# Altium PCB Avometer v1.0.PcbDoc
Units mm, origin at the board's own origin, x right, y up, seen from the top; angles counter-clockwise.
Board outline 45 x 22.5 mm, 2 copper layers (Top Layer, Bottom Layer), stack 1.571 mm thick; 39 components, 40 nets, 164 pads, 36 vias.
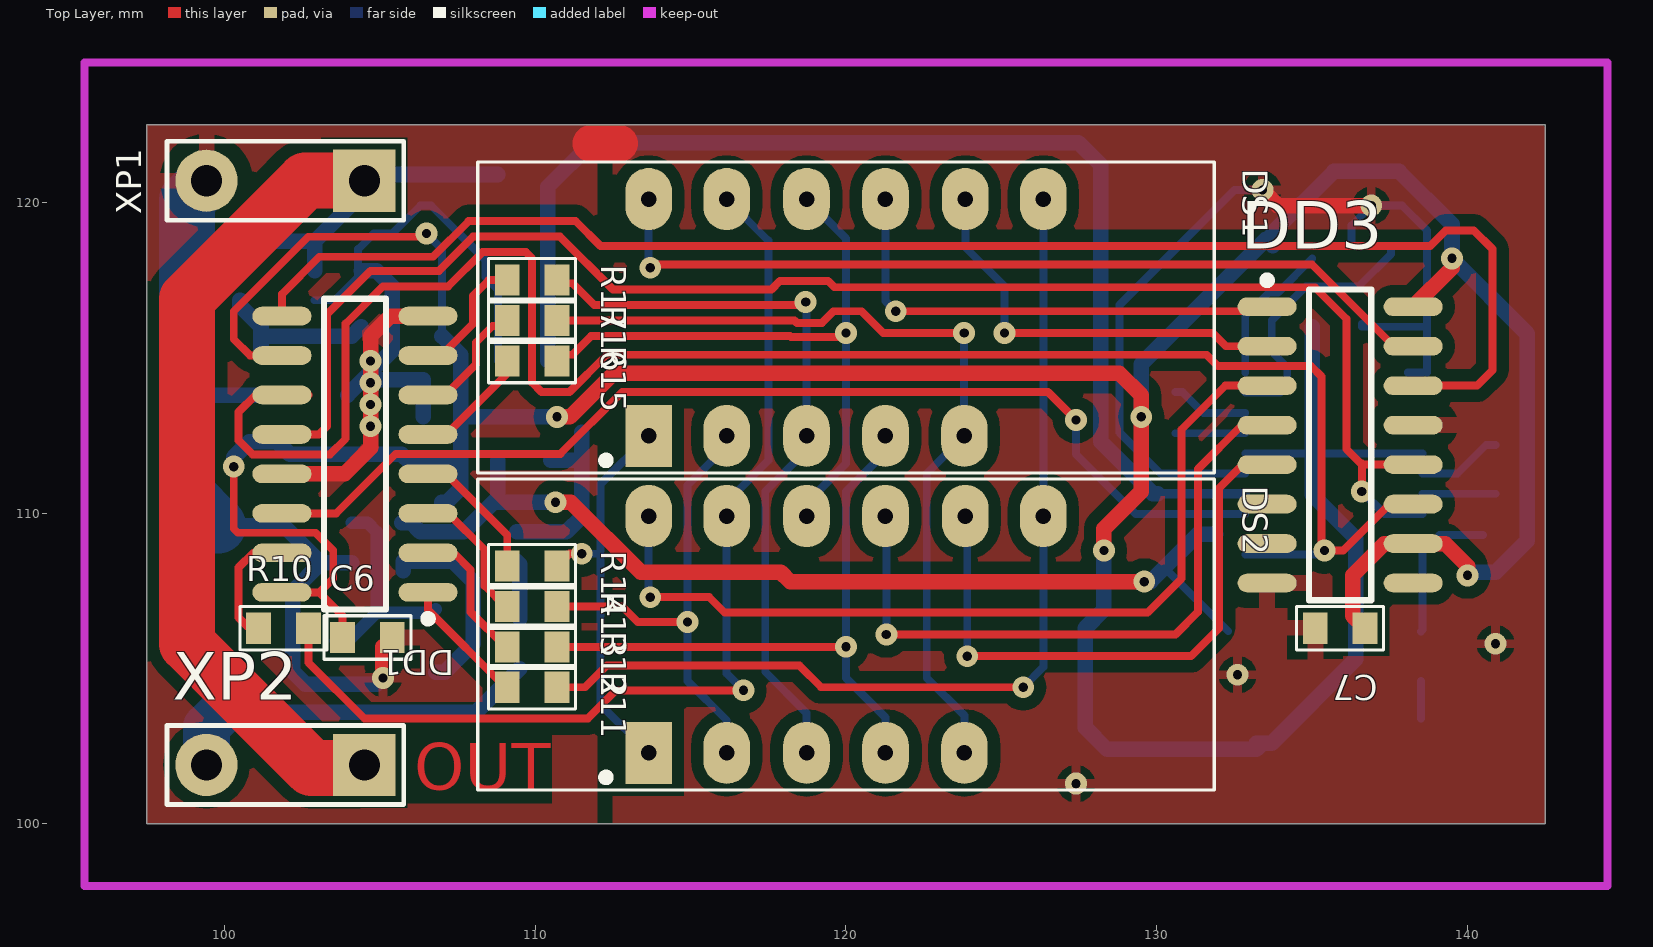
[diagram p0: Top Layer view]
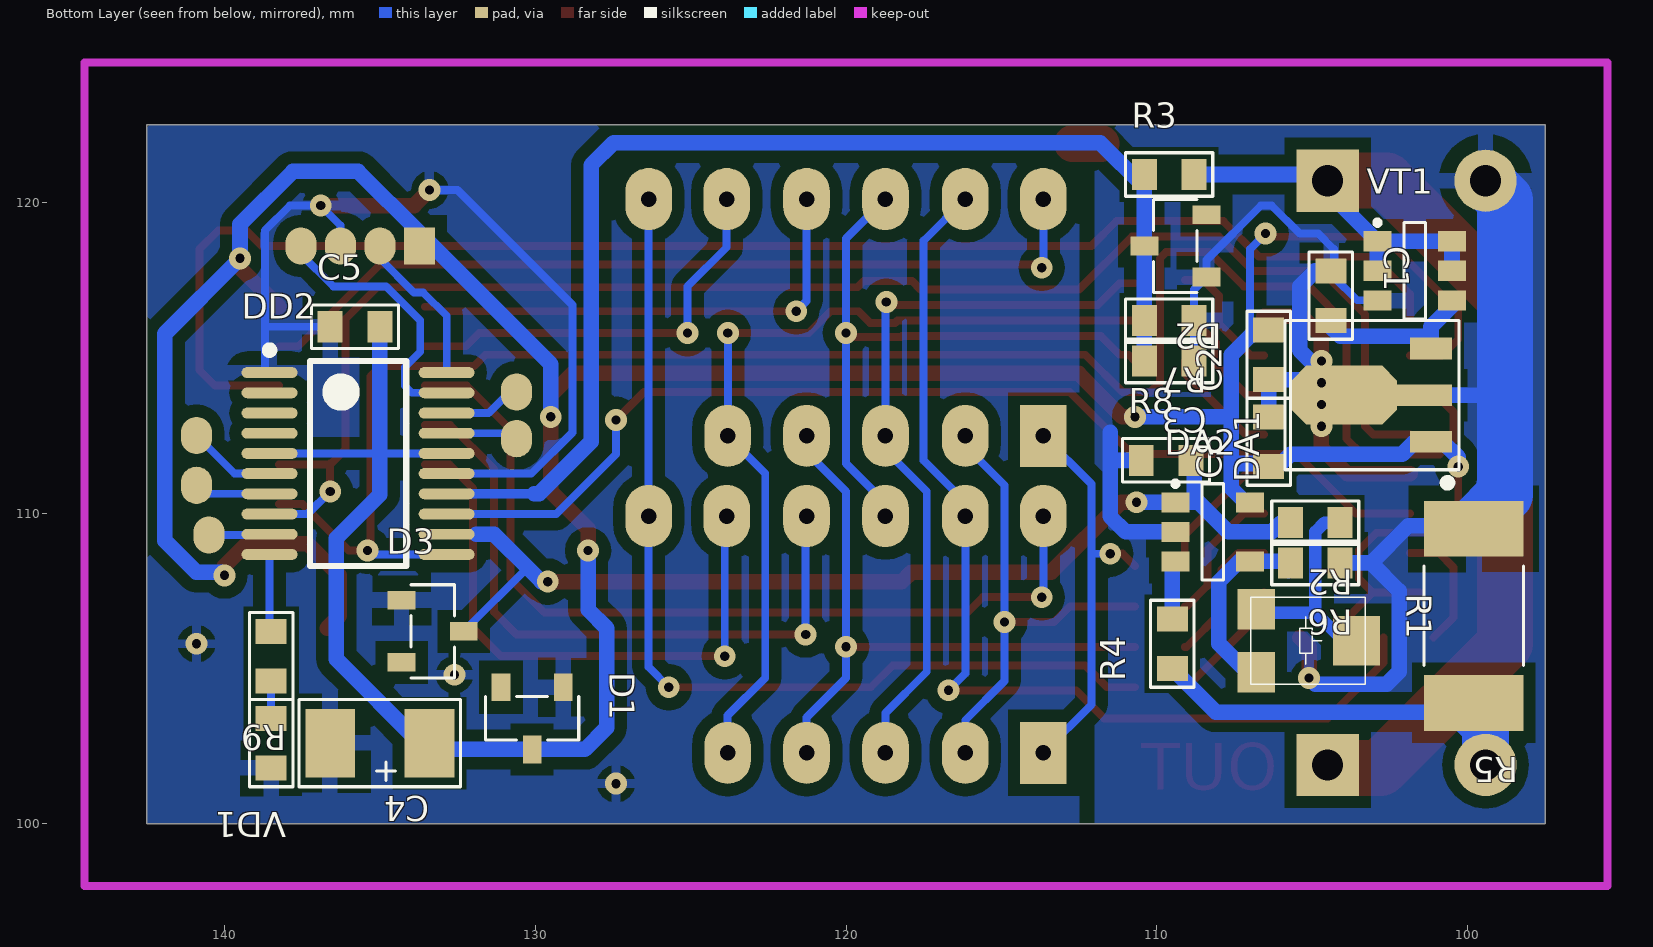
[diagram p1: Bottom Layer view, seen from below]
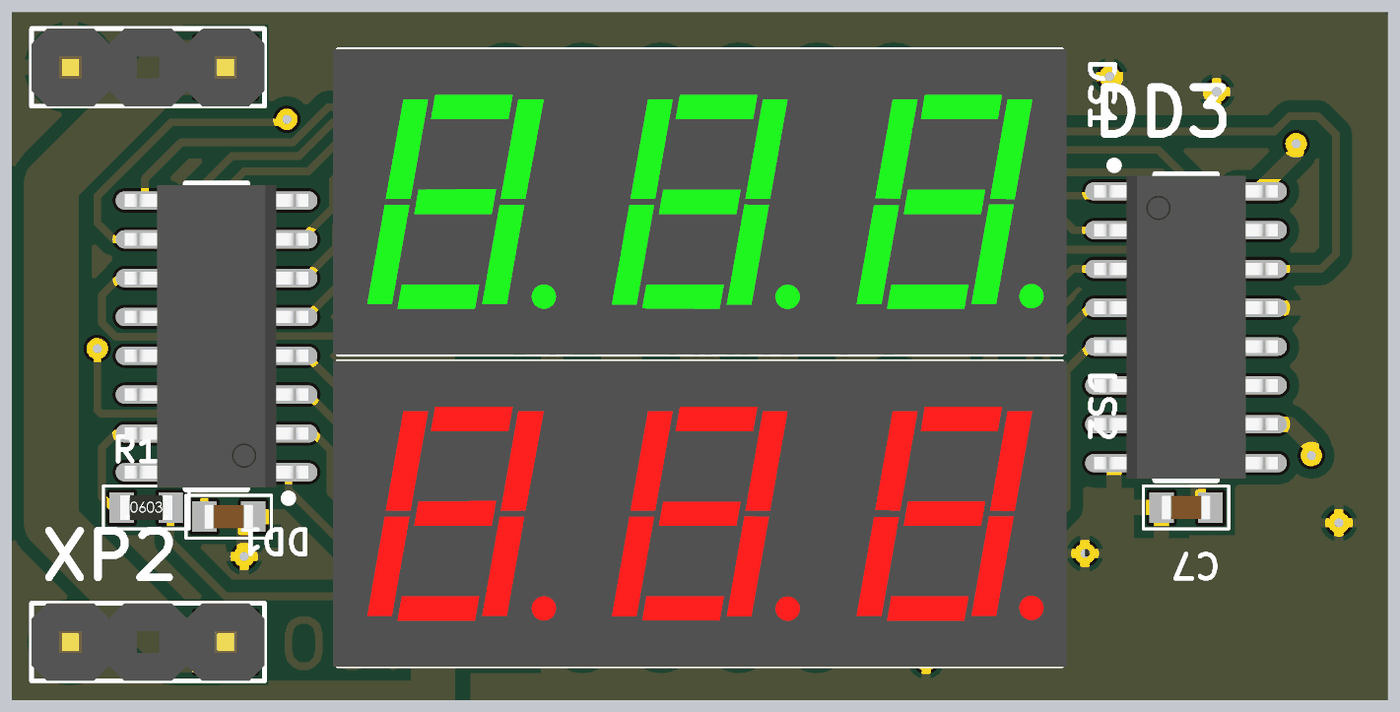
[diagram p2: 3D render of the assembled board from above, using the file's embedded part models]
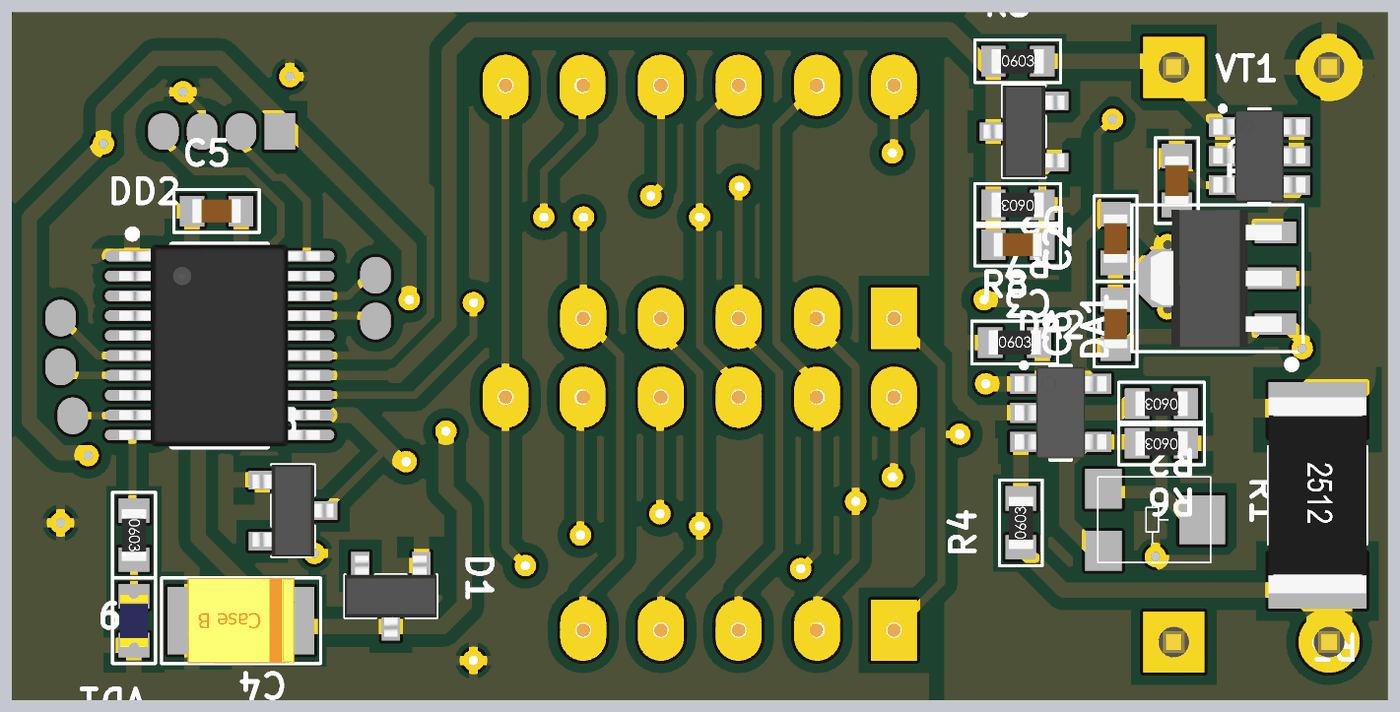
[diagram p3: 3D render of the assembled board from below, using the file's embedded part models]

## Layer stack, top to bottom
Top Solder: solder mask 0.0102, Solder Resist, Dk 3.5
Top Layer: signal copper 0.0356
Dielectric 1: dielectric 1.5, FR-4, Dk 4.8
Bottom Layer: signal copper 0.0356
Bottom Solder: solder mask 0.0102, Solder Resist, Dk 3.5

## Board outline
97.5,100 142.5,100 142.5,122.5 97.5,122.5

## Design rules (kind name [scope] priority, off if disabled: settings)
AssemblyTestPointUsage [All] p1 off:
AssemblyTestpoint [All] p1 off: testpointundercomponent=TRUE minsize=1.016 maxsize=2.54 preferedsize=1.524 minholesize=0 maxholesize=1.016 preferedholesize=0.813 testpointgrid=0.025 usegrid=TRUE gridtolerance=0 allowsidetop=TRUE allowsidebottom=TRUE
Clearance Cl-nce_USBUF [(ObjectKind = 'Pad') and (Component = 'DA10') vs ispad or isvia or istrack or isregion] p1: gap=0.15
Clearance Cl-nce_Poly-Pads&Vias_1 [InPolygon vs ispad or isvia or istrack or isregion or isfill] p2: gap=0.4
Clearance [All] p3: gap=0.2
ComponentClearance [All] p1: gap=0.1 collisioncheckmode=3 verticalgap=0.1 showdistances=FALSE
DiffPairsRouting [All] p1: maxlimit=100 minlimit=0.25 mostfreqgap=0.254 toplayer_minwidth=0.2 toplayer_maxwidth=0.5 toplayer_prefwidth=0.25 bottomlayer_minwidth=0.2 bottomlayer_maxwidth=0.5 bottomlayer_prefwidth=0.25 maxuncoupledlength=50
FabricationTestPointUsage [All] p1 off: valid=0 allowmultiple=FALSE
FabricationTestpoint [All] p1 off: side=3 testpointundercomponent=TRUE minsize=1.016 maxsize=2.54 preferedsize=1.524 minholesize=0 maxholesize=1.016 preferedholesize=0.813 testpointgrid=0.025 allowsidetop=TRUE allowsidebottom=TRUE usegrid=TRUE gridtolerance=0
HoleSize [All] p1: absolutevalues=TRUE maxlimit=4 minlimit=0.025 maxpercent=80.000 minpercent=20.000
MatchedLengths [InNetClass('DiffPairs')] p1: tolerance=1 checknetsindiffpair=TRUE checkdiffpairvsdiffpair=FALSE checkothers=FALSE
PlaneClearance [All] p1: clearance=0.1
PolygonConnect PCon_fill [All vs isregion or isfill] p1 off: connectstyle=Direct reliefconductorwidth=0.254 reliefentries=4 polygonreliefangle="90 Angle" airgapwidth=0.254
PolygonConnect PCon_via [All vs isvia] p2: connectstyle=Relief reliefconductorwidth=0.3 reliefentries=4 polygonreliefangle="90 Angle" airgapwidth=0.25
PolygonConnect [All] p3: connectstyle=Relief reliefconductorwidth=0.5 reliefentries=4 polygonreliefangle="90 Angle" airgapwidth=0.5
RoutingVias [All] p1: holewidth=0.3 width=1.27 viastyle="Through Hole" minholewidth=0.3 minwidth=1.27 maxholewidth=0.3 maxwidth=1.27
SilkToBoardRegionClearance [All] p1 off:
SilkToSilkClearance [All] p1 off: silktosilkclearance=0
SilkToSolderMaskClearance [IsPad] p1 off: minsilkscreentomaskgap=0.1 clearancetoexposedcopper=TRUE
SolderMaskExpansion [All] p1: expansion=0.102
Width [All] p1: maxlimit=2.5 minlimit=0.2 preferedwidth=0.254
18 further rules are at their usual default settings.

## Components (designator, comment, footprint, x,y, rotation, side; value= is the part's Value field where it differs from the comment)
C1 "0.1uF" "CAP 0603_N" 104.4,117 r270 bottom
C2 "0.1uF" "CAP 0603_N" 106.4,115.1 r90 bottom
C3 "0.1uF" "CAP 0603_N" 109.6,114.9 r0 bottom
C4 "100uF 6V3" CAP_TANT_B_TYPE_3528-21 135,102.6 r0 bottom
C5 "0.1" "CAP 0603_N" 135.8,116 r180 bottom
C6 "0.1" "CAP 0603_N" 104.6,106 r0 top
C7 "0.1" "CAP 0603_N" 135.9,106.3 r180 top
C8 "0.1" "CAP 0603_N" 106.4,112.3 r90 bottom
D1 "BZX84C3V6" SOT-23_L 130.1,103.4 r270 bottom
D2 "BZX84-3V6" SOT-23_L 109.4,118.6 r0 bottom
D3 "BZX84C3V6" SOT-23_L 133.3,106.2 r180 bottom
DA1 "L78L33ABUTR" SOT-89 101.4,113.8 r90 bottom
DA2 "MCP6001" SOT-23-5_L 108.2,109.4 r180 bottom
DD1 "74HC595D SMD" SOIC-16_L 104.2,111.9 r180 top
DD2 "STM32F030F4P6" TSSOP-20_N 135.7,111.6 r180 bottom
DD3 "74HC595D SMD" SOIC-16_L 135.9,112.2 r0 top
DS1 "7SEGM_E30281-L-O-0-W" "7SEGM_E30281-L-O-0-W GREEN" 120,116.3 r0 top
DS2 "7SEGM_E30281-L-O-0-W" "7SEGM_E30281-L-O-0-W RED" 120,106.1 r0 top
R1 "20k" "RES VAR 1" 105.2,105.9 r270 bottom
R2 "200k" "RES 0603_N" 104.9,109.7 r0 bottom
R3 "100k" "RES 0603_N" 109.6,120.9 r180 bottom
R4 "1k" "RES 0603_N" 109.5,105.8 r90 bottom
R5 "0.01" "RES 2512" 99.8,106.7 r270 bottom
R6 "10k" "RES 0603_N" 104.9,108.4 r0 bottom
R7 "15k" "RES 0603_N" 109.6,116.2 r0 bottom
R8 "100k" "RES 0603_N" 109.7,111.7 r180 bottom
R9 "1k" "RES 0603_N" 138.5,105.4 r270 bottom
R10 "100" "RES 0603_N" 101.9,106.3 r0 top
R11 "100" "RES 0603_N" 109.9,104.4 r0 top
R12 "100" "RES 0603_N" 109.9,105.7 r0 top
R13 "100" "RES 0603_N" 109.9,107 r0 top
R14 "100" "RES 0603_N" 109.9,108.3 r0 top
R15 "100" "RES 0603_N" 109.9,114.9 r0 top
R16 "100" "RES 0603_N" 109.9,116.2 r0 top
R17 "100" "RES 0603_N" 109.9,117.5 r0 top
VD1 "Blue" "LED 0603 BLUE" 138.5,102.6 r270 bottom
VT1 "IRLMS6802T" SOT-23-6_L 101.7,117.8 r180 bottom
XP1 "Input" CON_5.08MM_1X2 104.5,120.7 r180 top
XP2 "Output" CON_5.08MM_1X2 104.5,101.9 r180 top

## Footprints (in the part's own frame and the unit in brackets; to place one, negate y for a bottom-side part, rotate by r counter-clockwise, add the part's x,y. Pads: shape width x height; smd on the part's side, far side on the other; paste and mask are expansions set on the pad)
"7SEGM_E30281-L-O-0-W GREEN" [mm] "LED, 7-Segment Display, 7.62 mm, RHD; 10 Leads; Row Space 5.08 mm; Pitch 2.54 mm"
  rect 1.5x2 hole 0.5: 1(-6.35,-3.81)
  oval 1.5x2 hole 0.5: 2(-3.84,-3.81) 3(-1.27,-3.81) 4(1.27,-3.81) 5(3.81,-3.81) 7(6.35,3.81) 8(3.84,3.81) 9(1.27,3.81) 10(-1.27,3.81) 11(-3.84,3.81) 12(-6.35,3.81)
  silkscreen extent -11.85,-5 11.85,5, body extent -12,-5.01 12,5, height 6.31
"7SEGM_E30281-L-O-0-W RED" [mm] "LED, 7-Segment Display, 7.62 mm, RHD; 10 Leads; Row Space 5.08 mm; Pitch 2.54 mm"
  rect 1.5x2 hole 0.5: 1(-6.35,-3.81)
  oval 1.5x2 hole 0.5: 2(-3.84,-3.81) 3(-1.27,-3.81) 4(1.27,-3.81) 5(3.81,-3.81) 7(6.35,3.81) 8(3.84,3.81) 9(1.27,3.81) 10(-1.27,3.81) 11(-3.84,3.81) 12(-6.35,3.81)
  silkscreen extent -11.85,-5 11.85,5, body extent -12,-5.01 12,5, height 6.31
"CAP 0603_N" [mm] "Chip Capacitor; Body 1.6 x 0.8 mm (LxW typ)"
  rect 0.8x1 smd: 1(-0.8,0) 2(0.8,0)
  silkscreen extent -1.4,-0.7 1.4,0.7, body extent -0.8,-0.4 0.8,0.4, height 0.6
CAP_TANT_B_TYPE_3528-21 [mm] "Capacitor, SM Tantalum; Body 3.5 x 2.8 mm (LxW typ)"
  rect 1.6x2.2 smd: 1(-1.6,0) 2(1.6,0)
  silkscreen extent -2.6,-1.4 2.6,1.4, body extent -1.75,-1.4 1.75,1.4, height 1.9
CON_5.08MM_1X2 [mm] "Connector; Header; 2 Position"
  rect 2x2 hole 1: 1(0,0)
  round 2 hole 1: 2(5.08,0)
  silkscreen extent -1.27,-1.27 6.35,1.27, body extent -1.27,-1.27 6.35,1.27, height 8.5
"LED 0603 BLUE" [mm] "Chip Capacitor; Body 1.6 x 0.8 mm (LxW typ)"
  rect 0.8x1 smd: 1(-0.8,0) 2(0.8,0)
  silkscreen extent -1.4,-0.7 1.4,0.7, body extent -0.85,-0.45 0.85,0.45, height 0.9
"RES 0603_N" [mm] "Chip Resistor, Body 2.0x1.2mm, IPC Low Density"
  rect 0.8x1 smd: 1(-0.8,0) 2(0.8,0)
  silkscreen extent -1.4,-0.7 1.4,0.7, body extent -0.85,-0.4 0.85,0.4, height 0.56
"RES 2512" [mm] "Chip Resistor; Body 6.3 x 3.2 mm (LxW typ)"
  rect 1.8x3.2 smd: 1(-2.8,0) 2(2.8,0)
  silkscreen extent -1.6,-1.6 1.6,1.6, body extent -3.2,-1.6 3.2,1.6, height 0.6
"RES VAR 1" [mm] "Chip Resistor, Body 2.0x1.2mm, IPC Low Density"
  rect 1.3x1.2 smd: 1(-1.016,-1.6) 3(1.016,-1.6)
  rect 1.6x1.5 smd: 2(0,1.626)
  silkscreen extent -1.4,-1.78 1.4,1.9
SOIC-16_L [mm] "SOIC, 16-Leads, Body 9.9x3.9mm, Pitch 1.27mm, IPC High Density"
  oval 1.9x0.6 smd: 1(-2.35,4.445) 2(-2.35,3.175) 3(-2.35,1.905) 4(-2.35,0.635) 5(-2.35,-0.635) 6(-2.35,-1.905) 7(-2.35,-3.175) 8(-2.35,-4.445) 9(2.35,-4.445) 10(2.35,-3.175) 11(2.35,-1.905) 12(2.35,-0.635) 13(2.35,0.635) 14(2.35,1.905) 15(2.35,3.175) 16(2.35,4.445)
  silkscreen extent -2.48,-5 1,5.42, body extent -3,-4.95 3,4.95, height 1.4
SOT-23-5_L [mm] "SOT23, 5-Leads, Body 2.9x1.7mm, Pitch 0.95mm, Lead Span 2.8mm, IPC High Density"
  rect 0.9x0.65 smd: 1(-1.2,0.95) 2(-1.2,0) 3(-1.2,-0.95) 4(1.2,-0.95) 5(1.2,0.95)
  silkscreen extent -1.28,-1.55 0.35,1.63, body extent -1.5,-1.5 1.5,1.5, height 1.3
SOT-23-6_L [mm] "SOT23, 5-Leads, Body 2.9x1.7mm, Pitch 0.95mm, Lead Span 2.8mm, IPC High Density"
  rect 0.9x0.65 smd: 1(-1.2,0.95) 2(-1.2,0) 3(-1.2,-0.95) 4(1.2,-0.95) 5(1.2,0) 6(1.2,0.95)
  silkscreen extent -1.28,-1.55 0.35,1.63, body extent -1.5,-1.5 1.5,1.5, height 1.3
SOT-23_L [mm] "SOT23, 3-Leads, Body 2.9x1.3mm, Pitch 0.95mm, Lead Span 2.3mm - Reverse Pinning, IPC High Density"
  rect 0.9x0.6 smd: 1(-1,1) 2(-1,-1) 3(1,0)
  silkscreen extent -0.7,-1.5 0.7,1.5, body extent -1.32,-1.5 1.32,1.5, height 1.08
SOT-89 [mm] "SOT-89; Body 4.6 x 4.25 mm, inc. leads (LxW max)"
  rect 0.7x1.35 smd: 1(-1.5,-0.225) 3(1.5,-0.225)
  rect 0.7x1.8 smd: 2(0,0)
  oct 1.9x3.4 smd: 2(0,2.563)
  silkscreen extent -2.94,-1.12 2.4,4.48, body extent -2.25,-0.42 2.25,3.88, height 1.49
TSSOP-20_N [mm] "SOP, 20-Leads, Body 6.6x4.5mm, Pitch 0.65mm, IPC Medium Density"
  oval 1.8x0.35 smd: 1(-2.85,2.925) 2(-2.85,2.275) 3(-2.85,1.625) 4(-2.85,0.975) 5(-2.85,0.325) 6(-2.85,-0.325) 7(-2.85,-0.975) 8(-2.85,-1.625) 9(-2.85,-2.275) 10(-2.85,-2.925) 11(2.85,-2.925) 12(2.85,-2.275) 13(2.85,-1.625) 14(2.85,-0.975) 15(2.85,-0.325) 16(2.85,0.325) 17(2.85,0.975) 18(2.85,1.625) 19(2.85,2.275) 20(2.85,2.925)
  silkscreen extent -2.98,-3.3 1.55,3.77, body extent -3.27,-3.3 3.28,3.3, height 1.2

## Part data
C1 C2 C5 C6 C7 C8: library part CAP_SMD, "Capacitor SMD"
C3: library part CAP_SMD
C4: library part CAP_SMD_TANT, "Capacitor SMD Tantalum"
D1 D2 D3: library part BZX84, "Zener Diode"
DA1: "Vin=30V Positive Voltage Regulator"
DA2: "1 MHz, Low-Power Op Amp"
DD1 DD3: "8-Bit Shift Register with 3-State Output Registers"
DD2: "Cortex-M0 32-bit MCU, 16 KB Flash, 4 KB Internal RAM, 15 I/Os, 20-pin TSSOP, -40 to 85 degC"
DS1 DS2: "7 mm Black Surface Green 7-Segment Display: CC, RH DP"
R1: library part RES_SMD_Tap, "Tapped Resistor"
R2 R4 R6 R8 R10 R11 R12 R13 R14 R15 R16 R17: library part Resistor_SMD
R3 R7 R9: library part RES_SMD
R5: library part RES_SMD, "Resistor"
VD1: library part LED_SMD_0603, "LED 0603"
VT1: "P-Channel MOSFET 20V 4.5A"
XP1 XP2: library part CON_5.08mm_1x2, "Header, 2-Pin"

## Free pads (board coordinates)
  rect 1x1.2 smd far side: 1(133.73,118.6)
  oval 1x1.2 smd far side: 2(135,118.6) 3(130.6,112.4) 3(130.6,113.9) 3(136.27,118.6) 3(140.5,109.3) 3(140.9,110.9) 3(140.9,112.5) 4(137.54,118.6)

## Via types
v1: diameter 0.7, hole 0.3, Top Layer to Bottom Layer, 36 vias

## Nets (pads, with @x,y where several pads share a name; then routed paths per layer and width w, separated by ;. In a path a pad name is that pad's centre, name@x,y a point inside that pad or via, vN(x,y) a via of type N, cw(c..) or ccw(c..) an arc to the next point about the centre after c; other vN are vias at no path point)
24V: R3.2 VT1.1 VT1.2 VT1.5 VT1.6 XP1.1 XP2.1 | length 37.7
  Top Layer w1.8: XP2.1@104.5,102 104.3,101.8 102.8,101.8 98.8,105.8 98.8,116.9 102.6,120.7 XP1.1
  Bottom Layer w0.5: VT1.5 VT1.6 VT1.1 ; VT1.2 VT1.1 ; R3.2 104.3,120.9 104.1,121.1 104.1,119.95 VT1.1
GND: C1.1 C2.1 C3.1 C4.2 C5.1 C6.2 C7.2 C8.2 D1.1 D2.1 D3.1 DA1.2 DA2.2 DD1.8 DD1.13 DD2.1 DD2.15 DD3.8 DD3.13 pad.3@136.27,118.6 R5.1 R6.1 R7.1 R8.1 VD1.2 VT1.3 XP1.2 | length 92.8
  Top Layer w0.5: DD1.13 103.865,111.265 104.7,112.1 v1(104.7,112.8) v1(104.7,113.5) v1(104.7,114.2) v1(104.7,114.9) 104.7,115.7 105.345,116.345 DD1.8 ; v1(105.1,104.7) 105.1,105.7 C6.2 ; v1(133.4,120.4) 133.9,119.9 v1(136.9,119.9)
  Top Layer w1.2: 111.8,121.9 112.7,121.9
  Bottom Layer w0.25: VT1.3 103.55,116.85 104.3,117.6 104.3,118.5 104.8,119 105.4,119 106.3,119.9 106.651,119.9 108.4,118.151 D2.1 108.8,117.2 R7.1 C3.1 ; DD2.15 130.125,111.275 128.8,112.6 128.8,116.7 132.5,120.4 v1(133.4,120.4) ; pad.3@136.27,118.6 136.27,119.27 v1(136.9,119.9) 137.9,119.9 138.7,119.1 138.7,116.1 ; C5.1@136.6,116.1 C5.1 138.6,116 138.7,116.1 ; DD2.1@138.7,114.525 138.7,116.1
  Bottom Layer w0.254: DD2.1@138.075,114.525 DD2.1
  Bottom Layer w0.5: 98.8,113.8 DA1.2@101.4,113.8 ; R5.1@99.8,109.6 101.9,109.6 103.1,108.4 ; DA1.2@103.963,113.8 DA1.2@104.462,114.3 ; R6.1 103.1,108.4 ; C1.1 104.9,117.8 105.4,117.3 105.4,115.238 DA1.2@104.462,114.3 ; v1(105.1,104.7) 104.9,104.5 102.6,104.5 102.2,104.9 102.2,107.5 103.1,108.4 ; C8.2 C2.1 DA1.2@104.462,114.3 ; DA2.2 111,109.4 111.5,109.9 111.5,111.7 ; R8.1 111.5,111.7 ; 111.5,112.6 111.5,111.7
  Bottom Layer w1.8: XP1.2 98.8,120.08 98.8,113.8 98.8,110.6 R5.1@99.8,109.6
  other v1: 127.4,101.3 132.6,104.8 140.9,105.8
K1: DD3.15 DS1.12 | length 28
  Top Layer w0.254: v1@113.7,117.8 113.9,118 135,118 137.625,115.375 DD3.15
  Bottom Layer w0.254: v1@113.65,117.8 DS1.12
  other v1: 113.7,117.9
K2: DD3.1 DS1.9 | length 15.8
  Top Layer w0.254: v1@121.577,116.5 v1(121.6,116.5) 133.01,116.5 133.155,116.645 DD3.1
  Bottom Layer w0.254: DS1.9 121.27,116.83 v1(121.6,116.5)
K3: DD3.2 DS1.8 | length 13.3
  Top Layer w0.254: v1@125.225,115.8 131.8,115.8 132.225,115.375 DD3.2
  Bottom Layer w0.254: DS1.8 123.84,118.56 125.1,117.3 v1(125.1,115.8)
K4: DD3.3 DS2.12 | length 28.5
  Top Layer w0.254: v1(113.7,107.3) 115.6,107.3 116.1,106.8 129.7,106.8 130.8,107.9 130.8,112.7 132.205,114.105 DD3.3
  Bottom Layer w0.254: v1@113.65,107.3 DS2.12
K5: DD3.4 DS2.9 | length 21.6
  Top Layer w0.254: v1(121.3,106.1) 130.6,106.1 131.326,106.826 131.326,111.426 132.735,112.835 DD3.4
  Bottom Layer w0.254: DS2.9 121.3,109.88 v1(121.3,106.1)
K6: DD3.5 DS2.8 | length 19.4
  Top Layer w0.254: v1(123.9,105.4) 131.1,105.4 132,106.3 132,110.8 132.765,111.565 DD3.5
  Bottom Layer w0.254: DS2.8 123.9,109.85 v1(123.9,105.4)
LATCH: DD1.12 DD2.8 DD3.12 | length 50
  Top Layer w0.254: DD1.12 103.035,112.535 103.3,112.8 103.3,116.4 104.7,117.8 106.9,117.8 108,118.9 110.8,118.9 112.5,117.2 117.6,117.2 117.877,117.477 119.423,117.477 119.628,117.272 135.086,117.272 136.1,116.258 136.1,112.065 136.6,111.565 ; v1(136.6,110.7) 136.6,111.565 ; 136.6,111.6 136.6,111.565 ; DD3.12 136.6,111.565
  Bottom Layer w0.254: v1(136.6,110.7) 137.325,109.975 DD2.8
LED: DD2.10 R9.1 | length 2.5
  Bottom Layer w0.254: R9.1 138.55,106.25 DD2.10
MEAS_I: D3.3 DA2.1 DD2.12 R2.2 R8.2 | length 33.5
  Top Layer w0.5: v1(110.65,110.35) 111.15,110.35 113.4,108.1 117.9,108.1 118.2,107.8 v1(129.6,107.8)
  Bottom Layer w0.25: 130.25,108.25 D3.3
  Bottom Layer w0.5: R2.2 106,109.7 106.3,109.4 107.7,109.4 108.65,110.35 ; R8.2@108.8,111.7 108.8,110.5 108.65,110.35 ; v1(110.65,110.35) DA2.1 108.65,110.35 ; v1(129.6,107.8) 129.8,107.8 130.8,108.8 ; 130.25,108.25 131.325,109.325 131.9,109.325
MOSI: DD1.14 DD2.13 | length 34.9
  Top Layer w0.25: DD1.14 103.595,109.995 105.51,111.91 110.81,111.91 112.8,113.9 126.5,113.9 v1(127.4,113)
  Bottom Layer w0.25: v1(127.4,113) 127.4,111.9 129.325,109.975 DD2.13
NetC1_2: C1.2 DA1.3 VT1.4 | length 5.2
  Bottom Layer w0.5: VT1.4 100.5,116.675 101.175,116 DA1.3 ; 101.175,115.7 104.1,115.7 C1.2@104.4,116
NetDA2_3: DA2.3 R4.2 | length 1.9
  Bottom Layer w0.5: DA2.3 109.5,108.35 R4.2
NetDA2_4: DA2.4 R1.3 R6.2 | length 6.4
  Bottom Layer w0.5: R6.2@105.75,108.15 105.75,108.45 DA2.4 107.35,108.45 108,107.8 108,105.8 107.084,104.884 R1.3
NetDD1_1: DD1.1 R11.1 | length 4.1
  Top Layer w0.254: DD1.1 106.55,106.888 109.038,104.4 R11.1
NetDD1_2: DD1.2 R12.1 | length 4.6
  Top Layer w0.254: DD1.2 107.375,108.725 107.919,108.181 107.919,106.819 109.038,105.7 R12.1
NetDD1_3: DD1.3 R13.1 | length 4.5
  Top Layer w0.254: DD1.3 107.205,109.995 108.373,108.827 108.373,107.665 109.038,107 R13.1
NetDD1_4: DD1.4 R14.1 | length 4.4
  Top Layer w0.254: DD1.4 107.135,111.265 109.1,109.3 R14.1
NetDD1_5: DD1.5 R15.1 | length 3.8
  Top Layer w0.254: DD1.5 107.135,112.535 109.1,114.5 R15.1
NetDD1_6: DD1.6 R16.1 | length 3.7
  Top Layer w0.254: DD1.6 107.105,113.805 108.1,114.8 108.1,115.5 108.629,116.029 R16.1@108.871,116.029
NetDD1_7: DD1.7 R17.1 | length 4.1
  Top Layer w0.254: DD1.7 106.975,115.075 108,116.1 108,117 108.5,117.5 R17.1
NetDD1_9: DD1.9 DD3.14 | length 48.1
  Top Layer w0.254: DD1.9 101.85,117.05 103.054,118.254 106.712,118.254 107.858,119.4 111.3,119.4 112.1,118.6 138.8,118.6 139.3,119.1 140.2,119.1 140.8,118.5 140.8,114.6 140.305,114.105 DD3.14
NetDD1_15: DD1.15 R10.1 | length 4.1
  Top Layer w0.254: R10.1@101.1,106 100.454,106.646 100.454,108.254 100.925,108.725 DD1.15
NetDS1_1: DS1.1 DS2.1 R14.2 | length 13
  Top Layer w0.254: R14.2 111.1,108.7 v1(111.5,108.7)
  Bottom Layer w0.25: v1(111.5,108.7) 112.1,108.7
  Bottom Layer w0.254: DS2.1 112.1,103.84 112.1,108.7 112.1,110.94 DS1.1
NetDS1_2: DS1.2 DS2.2 R13.2 | length 15.7
  Top Layer w0.254: R13.2 112.8,107 113.3,106.5 v1(114.9,106.5)
  Bottom Layer w0.254: DS2.2 116.16,103.34 114.9,104.6 114.9,110.9 116.16,112.16 DS1.2
NetDS1_3: DS1.3 DS2.3 R17.2 | length 23.9
  Top Layer w0.254: R17.2@110.7,117.4 111.2,117.4 111.9,116.7 v1@118.7,116.7
  Bottom Layer w0.254: DS2.3 118.73,103.57 117.4,104.9 117.4,110.7 118.73,112.03 DS1.3 v1@118.73,116.8
  other v1: 118.7,116.8
NetDS1_4: DS1.4 DS2.4 R12.2 | length 20.6
  Top Layer w0.254: R12.2 v1(120,105.7)
  Bottom Layer w0.254: DS2.4 121.27,103.43 120,104.7 120,110.7 121.27,111.97 DS1.4
NetDS1_5: DS1.5 DS2.5 R16.2 | length 28.1
  Top Layer w0.254: R16.2 118.343,116.2 118.42,116.123 119.223,116.123 119.6,116.5 120.5,116.5 121.2,115.8 v1(123.8,115.8)
  Bottom Layer w0.254: v1(123.8,115.8) 123.8,112.5 DS1.5 122.6,111.28 122.6,104.7 123.81,103.49 DS2.5
NetDS1_7: DS1.7 DS2.7 R11.2 | length 31.6
  Top Layer w0.254: R11.2 111.6,104.4 112.3,105.1 118.5,105.1 119.2,104.4 v1(125.7,104.4)
  Bottom Layer w0.254: v1(125.7,104.4) 126.35,105.05 DS2.7 DS1.7
NetDS1_10: DS1.10 DS2.10 R15.2 | length 20.9
  Top Layer w0.254: R15.2 110.9,115.1 111.2,115.1 111.8,115.7 118.201,115.7 118.232,115.669 119.969,115.669 v1@120,115.7
  Bottom Layer w0.254: DS2.10 118.73,110.33 120,111.6 120,118.84 DS1.10
  other v1: 120,115.8
NetDS1_11: DS1.11 DS2.11 R10.2 | length 33.1
  Top Layer w0.254: R10.2@102.7,106 102.7,105.2 104.5,103.4 111.7,103.4 112.6,104.3 v1(116.7,104.3)
  Bottom Layer w0.254: DS1.11 117.5,118.77 117.5,111.7 116.16,110.36 DS2.11 116.16,104.84 v1(116.7,104.3)
NetR1_1: R1.1 R1.2 R2.1 | length 7.2
  Bottom Layer w0.4: R1.2 104,105.9 104.9,106.8 ; R2.1 104.6,109.7 104.9,109.4 104.9,106.8 ; R1.1 106.684,106.8 104.9,106.8
NetR4_1: R4.1 R5.2 XP2.2 | length 12.9
  Bottom Layer w0.5: R5.2 100.2,103.9 100.5,103.6 108.1,103.6 R4.1
  Bottom Layer w1.5: XP2.2 99.42,103.12 100.2,103.9 R5.2@100.3,104
NetR9_2: R9.2 VD1.1 | length 1.2
  Bottom Layer w0.254: VD1.1 R9.2
SCLK: DD1.11 DD2.11 DD3.11 | length 59.9
  Top Layer w0.254: DD1.11@102.705,113.805 DD1.11 101.005,113.805 100.454,113.254 100.454,112.346 100.908,111.892 103.392,111.892 103.9,112.4 103.9,116.1 105.1,117.3 107.2,117.3 108.3,118.4 109.7,118.4 109.9,118.2 109.9,114.2 110.2,113.9 111.1,113.9 112.3,115.1 131.6,115.1 131.968,114.732 134.968,114.732 135.3,114.4 v1@135.3,108.8 ; v1(135.4,108.8) 136,108.8 137.495,110.295 DD3.11
  Bottom Layer w0.254: DD2.11 135.275,108.675 v1(135.4,108.8)
SWCLK: DD2.20 pad.2 | length 4.7
  Bottom Layer w0.25: DD2.20 132.85,116.35 133.6,117.1 133.9,117.1 pad.2@135,118.2
SWDIO: DD2.19 pad.4 | length 8.7
  Bottom Layer w0.25: DD2.19 133.975,113.875 134.2,114.1 134.2,114.7 133.7,115.2 133.7,116.2 134.8,117.3 136.5,117.3 137.54,118.34 pad.4
VBAT: C3.2 D2.3 DD2.14 R3.1 R7.2 | length 38.5
  Bottom Layer w0.3: 130.025,110.625 DD2.14
  Bottom Layer w0.5: C3.2 R7.2 D2.3 110.4,120.5 111.823,121.923 127.477,121.923 128.2,121.2 128.2,112.3 129.875,110.625 130.025,110.625
VMCU: C2.2 C4.1 C5.2 C6.1 C7.1 C8.1 D1.3 DA1.1 DA2.5 DD1.10 DD1.16 DD2.5 DD2.16 DD3.10 DD3.16 pad.1 | length 136.3
  Top Layer w0.25: v1(100.3,111.5) 100.3,109.5 100.43,109.37 102.93,109.37 103.5,108.8 103.5,107.9 103.05,107.45 ; DD1.10 100.825,115.075 100.3,115.6 100.3,116.5 102.7,118.9 v1@106.2,118.9
  Top Layer w0.254: DD1.16@101.55,107.45 103.05,107.45 103.8,106.7 C6.1
  Top Layer w0.5: v1(110.7,113.1) 111.116,113.1 112.516,114.5 115.1,114.5 ; 115.1,114.5 128.8,114.5 129.5,113.8 v1(129.5,113.1) 129.5,110.7 128.3,109.5 v1(128.3,108.8) ; C7.1 136.3,106.7 136.3,108 137.325,109.025 DD3.10 139.275,109.025 140,108.3 v1(140,108) ; DD3.16 139.5,117.895 v1(139.5,118.2)
  Bottom Layer w0.25: v1(106.5,119) 107,118.5 107,115.7
  Bottom Layer w0.254: DD2.16 135,111.925 DD2.5
  Bottom Layer w0.5: v1(100.3,111.5) 100.3,111.8 100.8,112.3 DA1.1 101.7,112.3 102.1,111.9 105.7,111.9 106,111.6 107.6,111.6 ; DA2.5 107.15,110.35 107.6,110.8 107.6,111.6 ; 107,115.7 107.6,115.1 107.6,113.1 ; v1@110.8,113.1 107.6,113.1 ; v1(128.3,108.8) 128.3,106.9 127.7,106.3 127.7,103.1 128.4,102.4 D1.3 133.2,102.4 C4.1 ; v1(129.5,113.1) 129.5,114.8 pad.1@133.515,118.815 ; C4.1@133.2,102.6 133.7,102.6 136.4,105.3 136.4,109.2 135,110.6 135,111.925 C5.2 ; pad.1 133.73,119.03 135.7,121 137.8,121 139.5,119.3 v1(139.5,118.2) 141.923,115.777 141.923,109.123 140.9,108.1 v1@140.1,108.1 ; 107.6,111.6 107.6,113.1
pads on no net: D1.2 D2.2 D3.2 DD2.2 DD2.3 DD2.4 DD2.6 DD2.7 DD2.9 DD2.17 DD2.18 DD3.6 DD3.7 DD3.9
copper on no net: | length 11.3
  Bottom Layer w0.25: 130.6,112.575 132.85,112.575 ; 130.6,113.9 130.825,113.9 131.5,113.225 132.85,113.225 ; 138.55,110.625 139.95,110.625 140.9,110.625 ; 138.55,111.275 139.675,111.275 140.6,112.2 140.9,112.2 ; 139.1,109.3 140.5,109.3

## Polygon pours and split planes (outlines as drawn)
GND on Bottom Layer "Top Layer-No Net 1" (solid, pour order 5): 112.5,122.5 112.5,100 142.5,100 142.5,122.5
GND on Bottom Layer "Top Layer-No Net 1" (solid, pour order 2): 97.5,122.5 112,122.5 112,100 97.5,100
GND on Top Layer "Top Layer-No Net 1" (solid, pour order 5): 112.5,122.5 112.5,100 142.5,100 142.5,122.5
GND on Top Layer "Top Layer-No Net 1" (solid, pour order 2): 97.5,122.5 112,122.5 112,100 97.5,100

## Keep-outs
Keep-Out Layer:
  lines w0.254: 95.5,98 95.5,124.5 144.5,124.5 144.5,98 95.5,98

## Other copper
Top Layer:
  text "OUT" at 106.1,101.1 h1.5